# Altium PCB power.PcbDoc
Units mil, origin at the board's own origin, x right, y up, seen from the top; angles counter-clockwise.
Board outline 921.01 x 710.01 mil, 2 copper layers (Top Layer, Bottom Layer); 34 components, 19 nets, 86 pads, 15 vias.
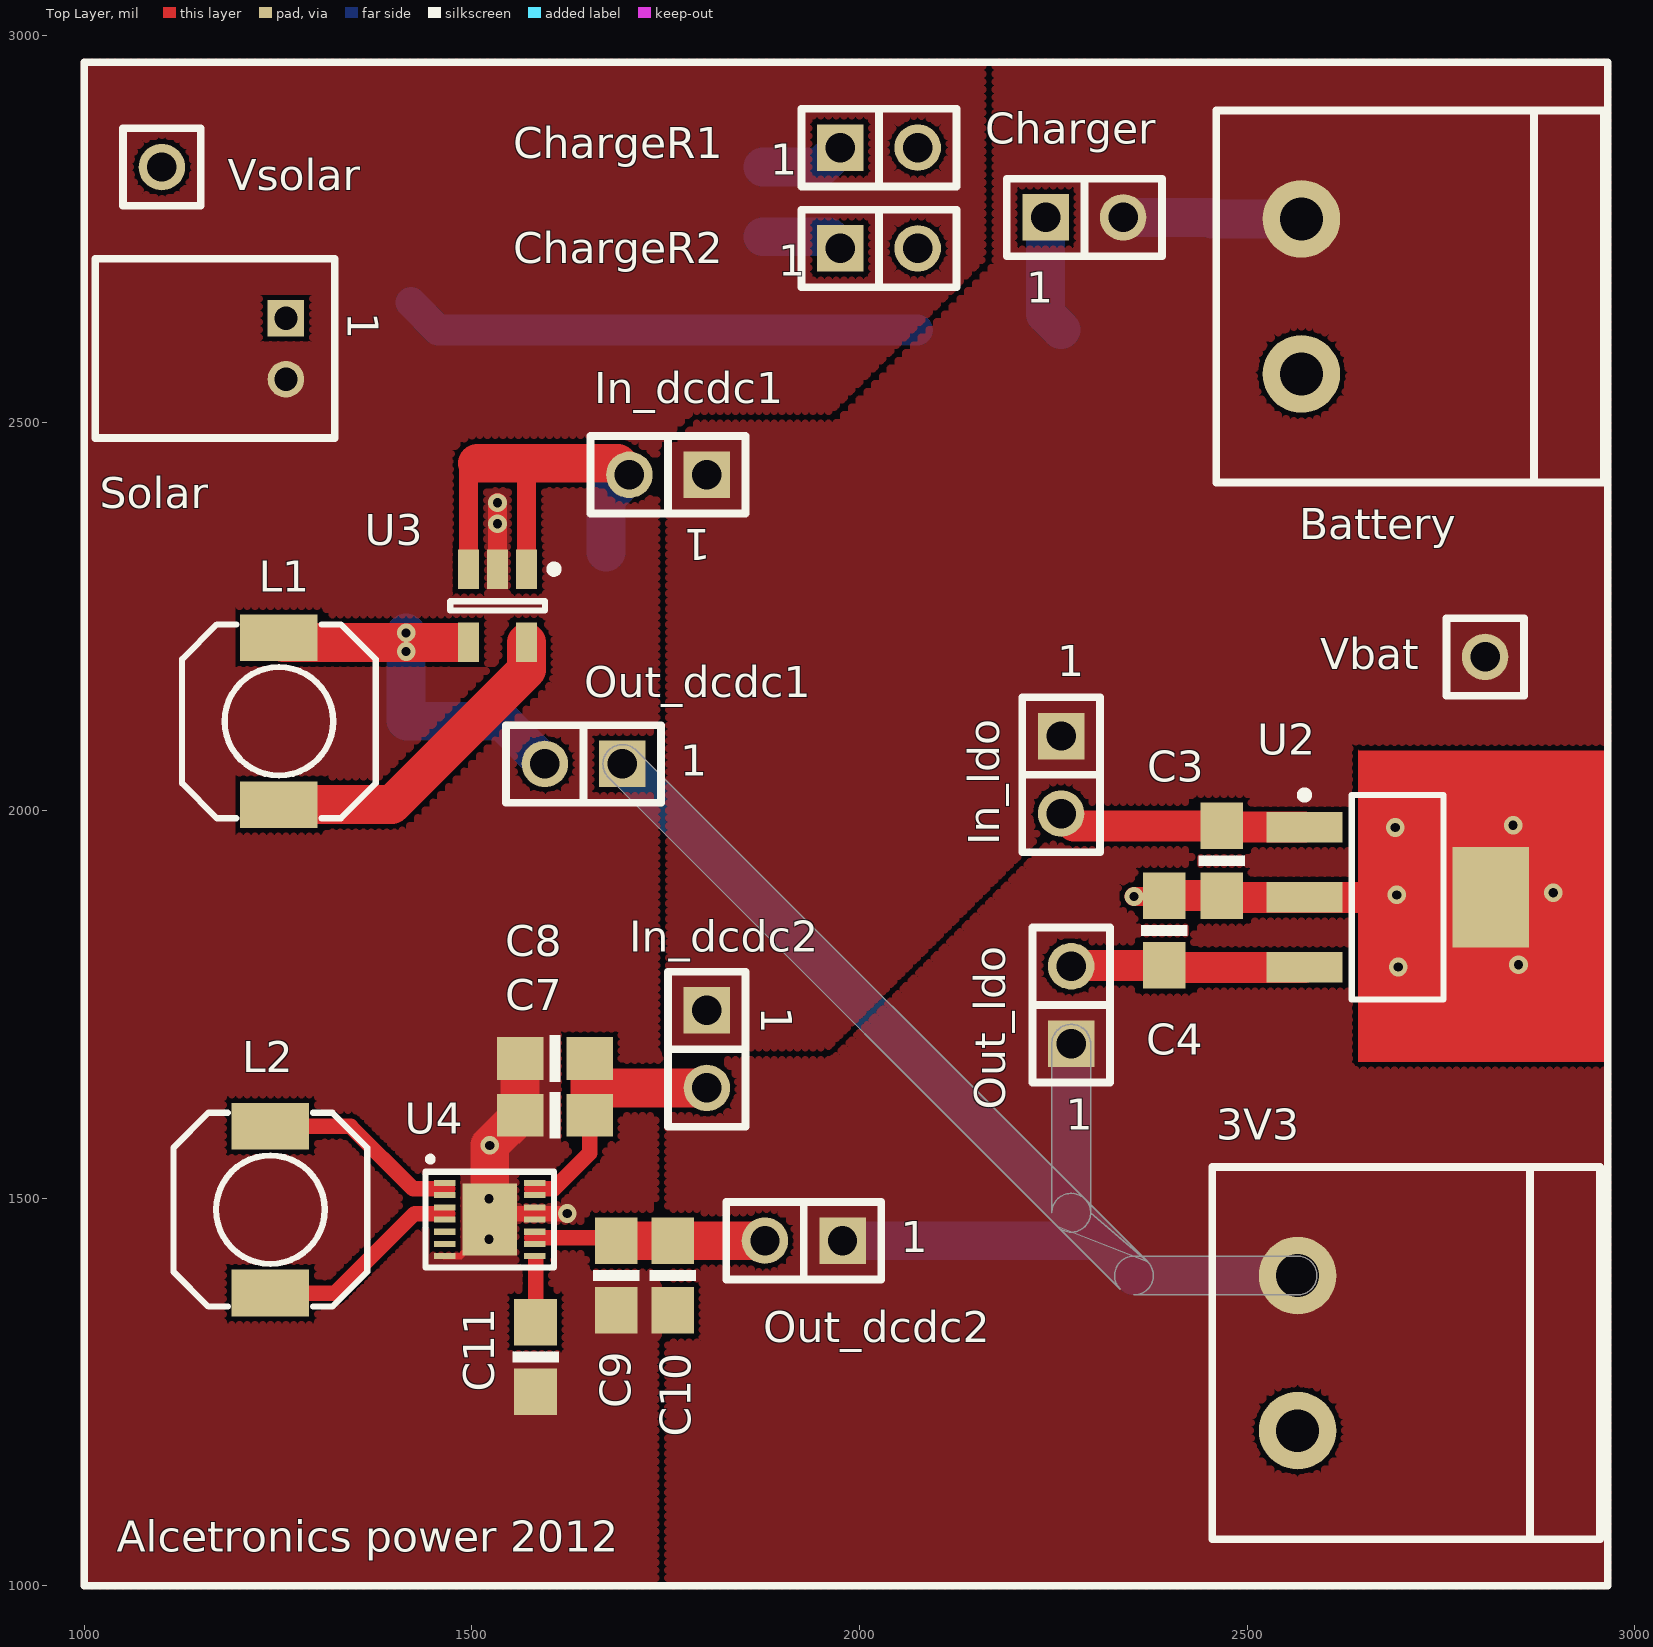
[diagram p0: Top Layer view]
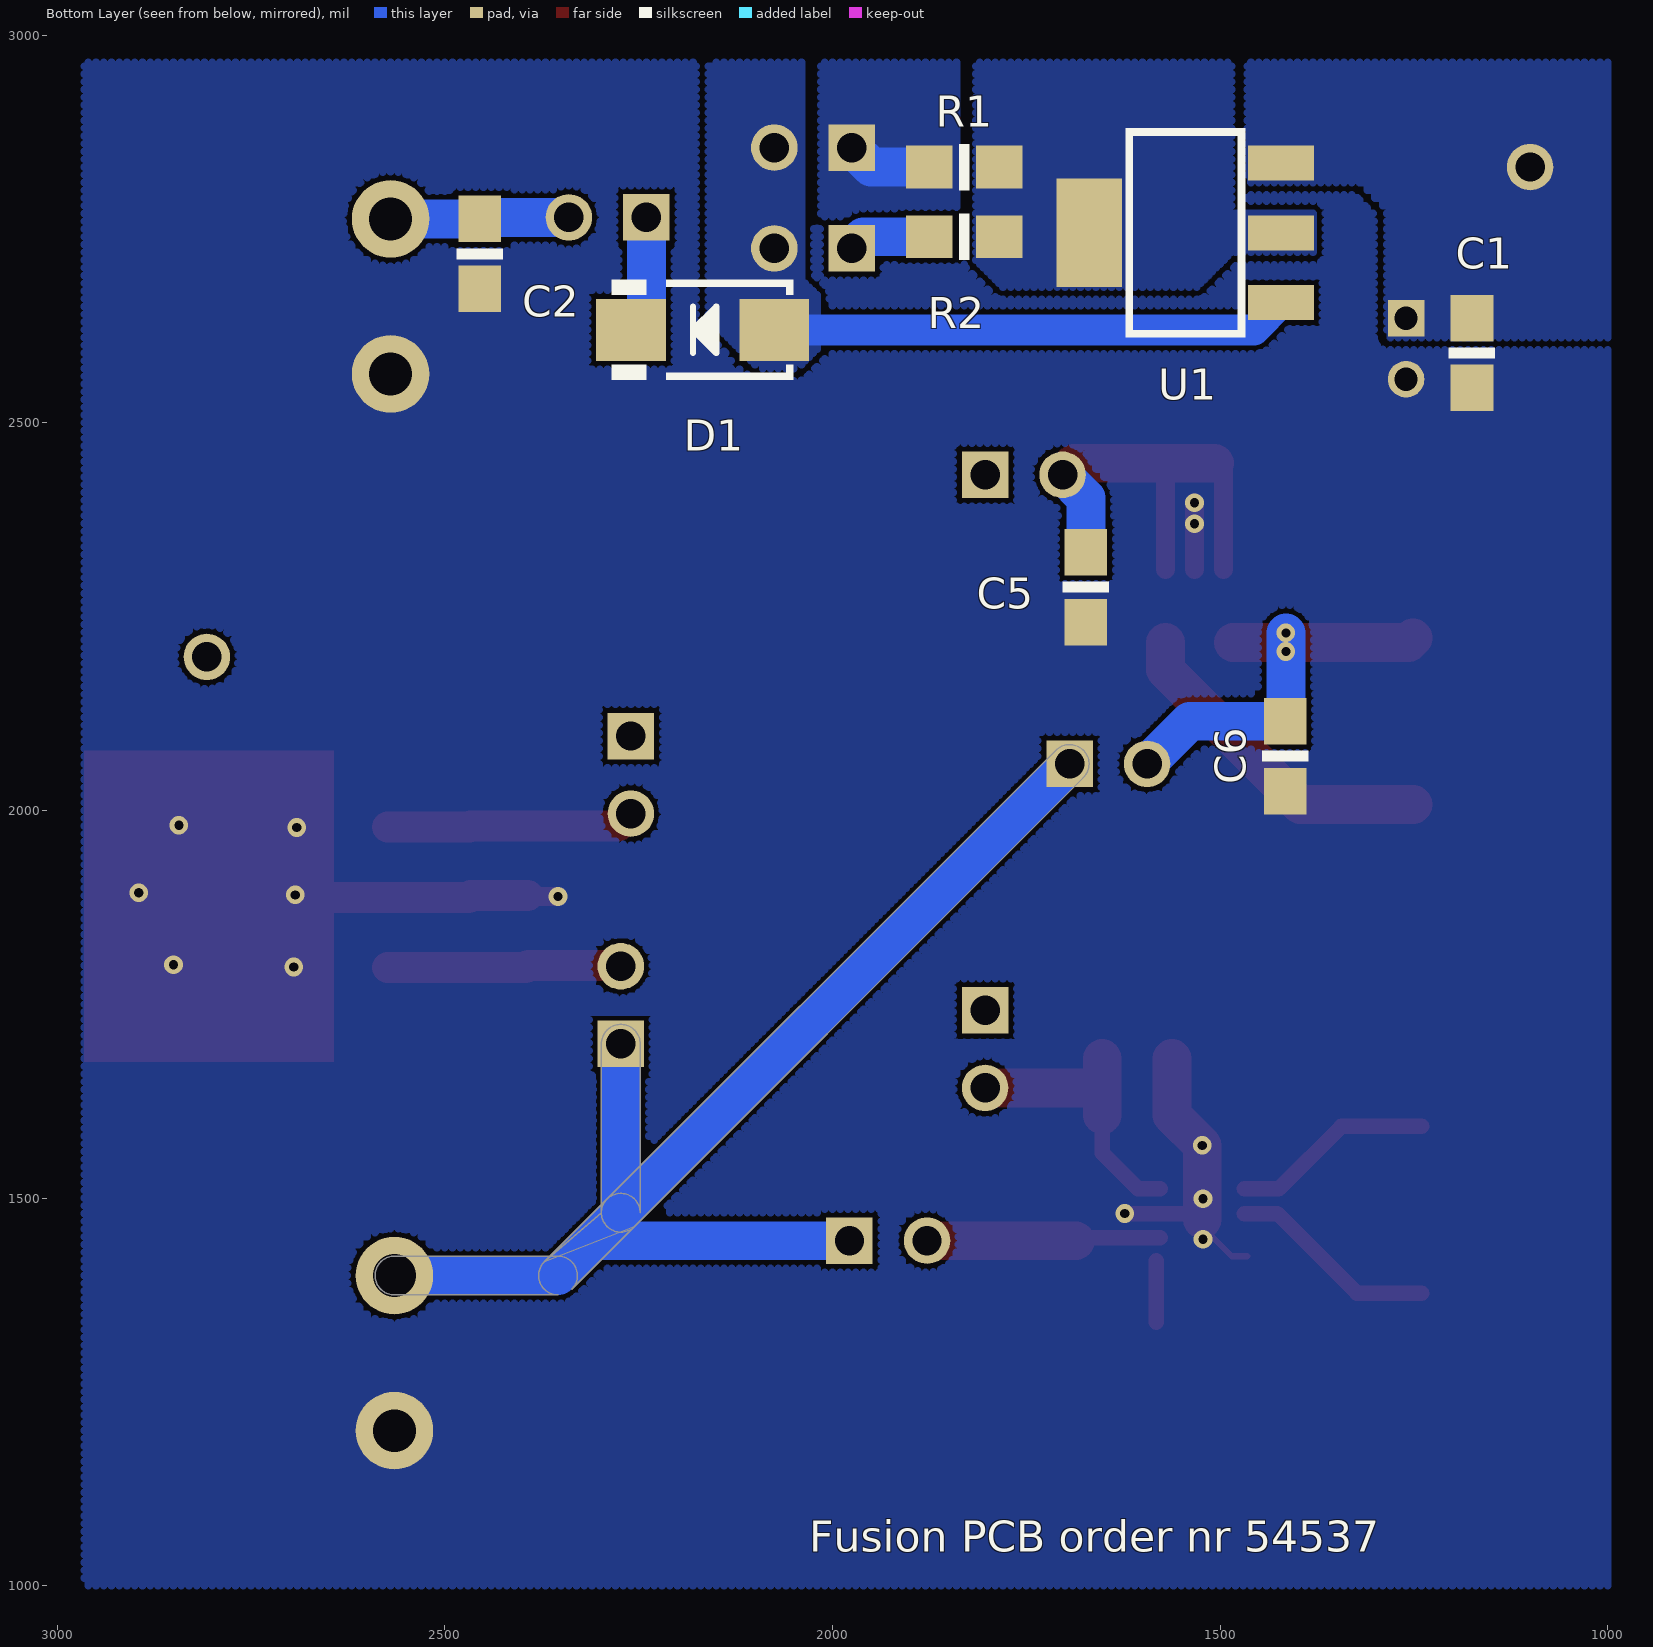
[diagram p1: Bottom Layer view, seen from below]

## Layer stack, top to bottom
Top Layer: signal copper 1.4
Dielectric: dielectric 12.6, FR-4, Dk 4.8
Bottom Layer: signal copper 1.4

## Board outline
2255.31,1463.31 ccw(c2273,1481) 2295.47,1470.02 ccw(c2273,1481) 2298.01,1481 2298.01,1699 ccw(c2273,1699) 2247.99,1699 2247.99,1481 cw(c2273,1481) 2290.69,1498.69 cw(c2273,1481) 2298.01,1481 2371.69,1417.69 1711.69,2077.69 ccw(c1694,2060) 1676.31,2042.31 2336.31,1382.31 cw(c2354,1400) 2354,1425.02 2565,1425.02 cw(c2565,1400) 2590.01,1400 cw(c2565,1400) 2565,1374.98 2354,1374.98 ccw(c2354,1400) 2379.01,1400 ccw(c2354,1400)

## Design rules (kind name [scope] priority, off if disabled: settings)
Clearance [All] p1: gap=6
HoleSize [All] p1: absolutevalues=TRUE maxlimit=100 minlimit=12 maxpercent=80.000 minpercent=20.000
PolygonConnect [All] p1: connectstyle=Direct reliefconductorwidth=10 reliefentries=4 polygonreliefangle="90 Angle"
RoomDefinition power [InComponentClass('PICKIT2')] p1: confinementstyle=ConfineIn formatcopy=TRUE lockcomponents=FALSE outline 1000,1000 2965,1000 2965,2965 1000,2965
RoutingVias [All] p1: holewidth=20 width=30 viastyle="Through Hole" minholewidth=12 minwidth=24 maxholewidth=28 maxwidth=50
SilkscreenOverComponentPads [All] p1: minsilkscreentomaskgap=10
SolderMaskExpansion [All] p1: expansion=4
Width [All] p1: maxlimit=100 minlimit=6 preferedwidth=10
26 further rules are at their usual default settings.

## Components (designator, comment, footprint, x,y, rotation, side; value= is the part's Value field where it differs from the comment)
3V3 "2P" INTERLOCK2-5MM 2565,1400 r270 top (schematic designator CON3)
Battery "2P" INTERLOCK2-5MM 2570,2763 r270 top (schematic designator CON2)
C1 "10uF" 0805 1175,2545 r90 bottom
C2 "10uF" 0805 2455,2673 r90 bottom
C3 "4.7uF" 0805 2467,1890 r90 top
C4 "1uF" 0805 2393,1890 r270 top
C5 "4.7uF" 0805 1673,2243 r90 bottom
C6 "4.7uF" 0805 1416,2025 r90 bottom
C7 "22uF" 0805 1652,1607 r180 top
C8 "22uF" 0805 1652,1680 r180 top
C9 "22uF" 0805 1686,1355 r90 top
C10 "22uF" 0805 1759,1355 r90 top
C11 "22uF" 0805 1582,1340 r270 top
Charger "2P" SIP-2 2240,2765 r0 top (schematic designator JP3)
ChargeR1 "2P" SIP-2 1975,2855 r0 top (schematic designator JP2)
ChargeR2 "2P" SIP-2 1975,2725 r0 top (schematic designator JP5)
D1 "MBRS130T3G" DO-214AC 2075,2620 r0 bottom
In_dcdc1 "2P" SIP-2 1803,2433 r180 top (schematic designator JP4)
In_dcdc2 "2P" SIP-2 1803,1742 r270 top (schematic designator JP6)
In_ldo "2P" SIP-2 2260,2096 r270 top (schematic designator JP1)
L1 "4u7H - SRN6045-4R7Y" 6X6 1251,2115 r90 top
L2 "3u3H - SRN6045-3R3Y" 6X6 1240,1485 r270 top
Out_dcdc1 "2P" SIP-2 1694,2060 r180 top (schematic designator JP8)
Out_dcdc2 "2P" SIP-2 1978,1445 r180 top (schematic designator JP9)
Out_ldo "2P" SIP-2 2273,1699 r90 top (schematic designator JP7)
R1 "15R" 0805 1875,2830 r180 bottom
R2 "10R" 0805 1875,2740 r180 bottom
Solar "2P" JST-2MM 1260,2635 r270 top (schematic designator CON1)
U1 "LM1117MP-ADJ" SOT-223 1545,2745 r90 bottom
U2 "MCP1824ST-3302E/DB" SOT-223-DB3_M 2694,1888 r0 top
U3 "MCP1603T-330I/OS" TSOT-OS5_M 1533,2264 r270 top
U4 "MAX8625A" TDFN-EP-14 1465,1425 r0 top
Vbat "VBAT" TERMINAL 2807,2198 r0 top (schematic designator TP2)
Vsolar "VSOL" TERMINAL 1100,2830 r0 top (schematic designator TP1)

## Footprints (in the part's own frame and the unit in brackets; to place one, negate y for a bottom-side part, rotate by r counter-clockwise, add the part's x,y. Pads: shape width x height; smd on the part's side, far side on the other; paste and mask are expansions set on the pad)
6X6 [mil]
  rect 60x100 smd: 1(-107.5,0) 2(107.5,0)
  silkscreen extent -125,-125 125,125
0805 [mil]
  rect 60x55 smd: 1(0,0) 2(90,0)
  silkscreen extent 38,-30 52,30
DO-214AC [mil]
  rect 90x80 smd: A(0,0) K(185,0)
  silkscreen extent -25,-65 210,65
INTERLOCK2-5MM [mil]
  round 100 hole 55: 1(0,0) 2(200,0)
  silkscreen extent -140,-110 340,390
JST-2MM [mm] "JST 2mm header side entry"
  rect 1.2x1.2 hole 0.762: 1(0,0)
  round 1.2 hole 0.762: 2(2,0)
  silkscreen extent -1.95,-6.25 3.93,1.6
SIP-2 [mil]
  rect 60x60 hole 38: 1(0,0)
  round 60 hole 38: 2(100,0)
  silkscreen extent -50,-50 150,50
SOT-223 [mil] "Small Outline"
  rect 45x85 smd: 1(-90,-123.75) 2(0,-123.75) 3(90,-123.75)
  rect 140x85 smd: TAB(0,123.75)
  silkscreen extent -135,-78 135,77
SOT-223-DB3_M [mm] "SOT223, 4-Leads, Body 6.5x3.5mm, Pitch 2.3mm, Lead Span 7mm, IPC Low Density"
  rect 2.5x1 smd: 1(-3.05,2.3) 2(-3.05,0) 3(-3.05,-2.3)
  rect 2.5x3.3 smd: 4(3.05,0)
  silkscreen extent -3.17,-3.35 1.5,3.47, body extent -1.85,-3.35 1.85,3.35, height 1.8
TDFN-EP-14 [mm]
  rect 0.7x0.2 smd mask+0: 1(0,2.4) 2(0,2) 4(0,1.2) 6(0,0.4) 9(2.95,0.4) 11(2.95,1.2) 13(2.95,2) 14(2.95,2.4)
  rect 0.7x0.2 smd paste+0 mask+0: 3(0,1.6) 5(0,0.8) 7(0,0) 8(2.95,0) 10(2.95,0.8) 12(2.95,1.6)
  rect 1.78x2.35 smd mask+0: EP(1.47,1.2)
  silkscreen extent -0.63,-0.37 3.58,3.23
TERMINAL [mil]
  round 60 hole 37.99: 1(0,0)
  silkscreen extent -50,-50 50,50
TSOT-OS5_M [mm] "SOT23, 5-Leads, Body 2.9x1.6mm, Pitch 0.95mm, Lead Span 2.8mm, IPC Low Density"
  rect 1.3x0.7 smd: 1(-1.2,0.95) 2(-1.2,0) 3(-1.2,-0.95) 4(1.2,-0.95) 5(1.2,0.95)
  silkscreen extent -1.32,-1.55 0.15,1.98, body extent -0.9,-1.55 0.9,1.55, height 1.1

## Part data
3V3 Battery Solar: library part CON02, "Connector 2 pins"
C1 C2 C3 C4 C5 C6 C7 C8 C9 C10 C11: library part CAP, "Capacitor"
Charger ChargeR1 ChargeR2 In_dcdc1 In_dcdc2 In_ldo Out_dcdc1 Out_dcdc2 Out_ldo: library part JMP2, "2-pin Jumper"
D1: library part Diode, "Vishay Standard Avalanche Sinterglass Diode"
L1 L2: library part IND, "Inductor"
R1 R2: library part RES, "Resistor"
U1: library part LM1117-ADJ, "800mA, Low Drop Adjustable Voltage Regulator"
U2: "300 mA, Low Voltage, Low Quiescent Current LDO Regulator, 3-Pin SOT-223, Extended Temperature, Tape and Reel"
U3: "500mA Synchronous Buck Regulator, 3.3V, 2.0 MHz, 5-Pin TSOT, Industrial Temperature, Tape and Reel"
U4: "Step up/down DCDC converter"
Vbat Vsolar: library part TEST-PROBE, "Test/Probe Point"

## Via types
v1: diameter 24, hole 12, Top Layer to Bottom Layer, 15 vias

## Nets (pads, with @x,y where several pads share a name; then routed paths per layer and width w, separated by ;. In a path a pad name is that pad's centre, name@x,y a point inside that pad or via, vN(x,y) a via of type N, cw(c..) or ccw(c..) an arc to the next point about the centre after c; other vN are vias at no path point)
GND: 3V3.2 Battery.2 C1.1 C2.1 C3.1 C4.1 C5.1 C6.1 C7.2 C8.2 C9.1 C10.1 C11.2 Solar.2 U2.2 U2.4 U3.2 U4.7 U4.11 U4.12 U4.EP | length 956
  Top Layer w8: U4.7 1485,1425 1522.87,1462.87 U4.EP
  Top Layer w20: U4.EP@1521,1480 1522.87,1480 v1(1623,1480)
  Top Layer w25: U3.2 v1(1533,2397) ; v1(2354,1889) 2392,1889 C4.1
  Top Layer w40: C4.1 C3.1 2469,1888 U2.2 U2.4
  Top Layer w50: U4.EP 1522.87,1480 v1(1522.87,1567.87) C7.2 C8.2
  other v1: 1522,1447 1522,1499 2695,1798 2850,1801 2693,1891 2895,1894 2691,1978 2843,1981 1533,2370
NetC1_2: C1.2 Solar.1 U1.3 Vsolar.1
NetC11_1: C11.1 U4.8 | length 79
  Top Layer w20: C11.1 1582,1419
NetD1_A: ChargeR1.2 ChargeR2.2 D1.A U1.1 | length 668.2
  Bottom Layer w40: U1.1 1456.25,2620 D1.A
NetD1_K: Charger.1 D1.K | length 153.3
  Bottom Layer w50: Charger.1 2240,2640 D1.K
NetJP2_1: ChargeR1.1 R1.1 | length 110.4
  Bottom Layer w50: R1.1 1950,2830 ChargeR1.1
NetJP5_1: ChargeR2.1 R2.1 | length 106.2
  Bottom Layer w50: R2.1 1960,2740 ChargeR2.1
NetL1_1: L1.1 U3.5 | length 426.8
  Top Layer w50: L1.1 1396.5,2007.5 1570.4,2181.4 U3.5
NetL2_1: L2.1 U4.1 U4.2 | length 262.3
  Top Layer w20: L2.1 1343.5,1592.5 1424,1512 1469,1512
NetL2_2: L2.2 U4.3 U4.4 | length 271.5
  Top Layer w20: L2.2 1323.5,1377.5 1426,1480 1469,1480
NetR1_2: R1.2 R2.2 U1.2 U1.TAB
VBAT: Battery.1 C2.2 Charger.2 In_dcdc1.1 In_dcdc2.1 In_ldo.1 Vbat.1 | length 230.8
  Bottom Layer w50: Charger.2 2453,2765 C2.2 Battery.1
VIN_DCDC: C5.2 In_dcdc1.2 U3.1 U3.3 | length 578
  Top Layer w25: U3.3 1495.6,2436.6 1507,2448 ; 1570,2433 1570.4,2432.6 U3.1
  Top Layer w50: 1507,2448 1688,2448 In_dcdc1.2
  Bottom Layer w50: C5.2 1673,2403 In_dcdc1.2
VIN_DCDC2: C7.1 C8.1 In_dcdc2.2 U4.13 U4.14 | length 368.3
  Top Layer w20: 1577,1512 1606,1512 1652,1558 C7.1
  Top Layer w50: C7.1 1652,1639 ; C8.1 1652,1639 ; In_dcdc2.2 1655,1642 1652,1639
VIN_LDO: C3.2 In_ldo.2 U2.1 | length 321.1
  Top Layer w40: In_ldo.2 2276,1980 C3.2 2468.45,1978.55 U2.1
VOUT: 3V3.1 Out_dcdc1.1 Out_dcdc2.1 Out_ldo.1 | length 1693.4
  Bottom Layer w50: Out_dcdc1.1 2273,1481 ; Out_dcdc2.1 2309,1445 ; Out_ldo.1 2273,1481 ; 3V3.1 2354,1400 2309,1445 ; 2273,1481 2309,1445
VOUT_DCDC: C6.2 L1.2 Out_dcdc1.2 U3.4 | length 549.6
  Top Layer w50: L1.2 1256.74,2216.76 U3.4@1483,2216.76
  Bottom Layer w50: v1(1415,2229) v1(1415,2205) 1415,2116 C6.2 1539,2115 Out_dcdc1.2
VOUT_DCDC2: C9.2 C10.2 Out_dcdc2.2 U4.9 U4.10 | length 293
  Top Layer w20: 1577,1449.01 C9.2@1678,1449.01
  Top Layer w50: C9.2 C10.2 Out_dcdc2.2
VOUT_LDO: C4.2 Out_ldo.2 U2.3 | length 302.4
  Top Layer w30: Out_ldo.2 Out_ldo.2@2274,1800
  Top Layer w40: Out_ldo.2@2274,1800 C4.2 2395.55,1797.45 U2.3
pads on no net: U4.5 U4.6

## Polygon pours and split planes (outlines as drawn)
GND on Bottom Layer "Bottom Layer-No Net" (hatched 90Degree grid 10 track 10, remove dead copper, pour order 14): 1000,2965 2965,2965 2965,1000 1000,1000
NetD1_A on Bottom Layer "Bottom Layer-No Net" (hatched 90Degree grid 10 track 10, remove dead copper, pour order 10): 2040,2965 2040,2685 2020,2665 2020,2595 2045,2570 2095,2570 2160,2635 2160,2965 2040,2965
NetJP2_1 on Bottom Layer "Bottom Layer-No Net" (hatched 90Degree grid 10 track 10, remove dead copper, pour order 8): 1840,2965 1840,2705 1875,2670 1985,2670 2015,2700 2015,2965 1840,2965
NetR1_2 on Bottom Layer "Bottom Layer-No Net" (hatched 90Degree grid 10 track 10, remove dead copper, pour order 4): 1485,2965 1485,2770 1380,2770 1380,2720 1485,2720 1530,2675 1625,2675 1780,2675 1815,2710 1815,2965 1485,2965
NetC1_2 on Bottom Layer "Bottom Layer-No Net" (hatched 90Degree grid 10 track 10, remove dead copper, pour order 2): 1000,2965 1460,2965 1465,2960 1465,2810 1320,2810 1285,2775 1285,2610 1000,2610 1000,2965
GND on Top Layer "Bottom Layer-No Net" (hatched 90Degree grid 10 track 10, remove dead copper, pour order 12): 2167,2965 1000,2965 1000,1000 1742,1000 1742,2465 1788,2511 1965,2511 2167,2713 2167,2965
VOUT on Top Layer "Bottom Layer-No Net" (hatched 90Degree grid 10 track 10, remove dead copper, pour order 10): 2965,1976 2252,1976 2183,1907 1961,1685 1753,1685 1753,1000 2965,1000
VBAT on Top Layer "Bottom Layer-No Net" (hatched 90Degree grid 10 track 10, remove dead copper, pour order 8): 2965,2965 2175,2965 2175,2705 1969,2499 1790,2499 1754,2463 1754,1694 1958,1694 2260,1996 2965,1996

## Other copper
Top Layer:
  region net GND: 2965,2077 2965,1676 2643,1676 2643,2078 2644,2077

## Silkscreen, mask and mechanical layers (free items; w line width, h text height)
Top Overlay:
  lines w10: 1000,1000 2965,1000 2965,2965 1000,2965 1000,1000
  text "Alcetronics power 2012" at 1042,1044 h40
Bottom Overlay:
  text "Fusion PCB order nr 54537" at 2030,1044 h40

## Text inside footprints (layer, text, board x,y; h text height)
Charger: Top Overlay "1" at 2215,2655 h40
ChargeR1: Top Overlay "1" at 1885,2820 h40
ChargeR2: Top Overlay "1" at 1895,2690 h40
In_dcdc1: Top Overlay "1" at 1808,2363 h40 r180
In_dcdc2: Top Overlay "1" at 1873,1747 h40 r270
In_ldo: Top Overlay "1" at 2255,2173 h40
Out_dcdc1: Top Overlay "1" at 1769,2045 h40
Out_dcdc2: Top Overlay "1" at 2053,1430 h40
Out_ldo: Top Overlay "1" at 2266,1588 h40
Solar: Top Overlay "1" at 1339.72,2642.87 h40 r270